# Altium PCB Digital_Input_PCB.PcbDoc (part 2 of 3)
Units mil, origin at the board's own origin, x right, y up, seen from the top; angles counter-clockwise.
Board outline 5600 x 4000 mil, 4 copper layers (Top Layer, Plane(Gnd), Plane(Power), Bottom Layer), stack 23.756 mil thick; 260 components, 287 nets, 712 pads, 291 vias.
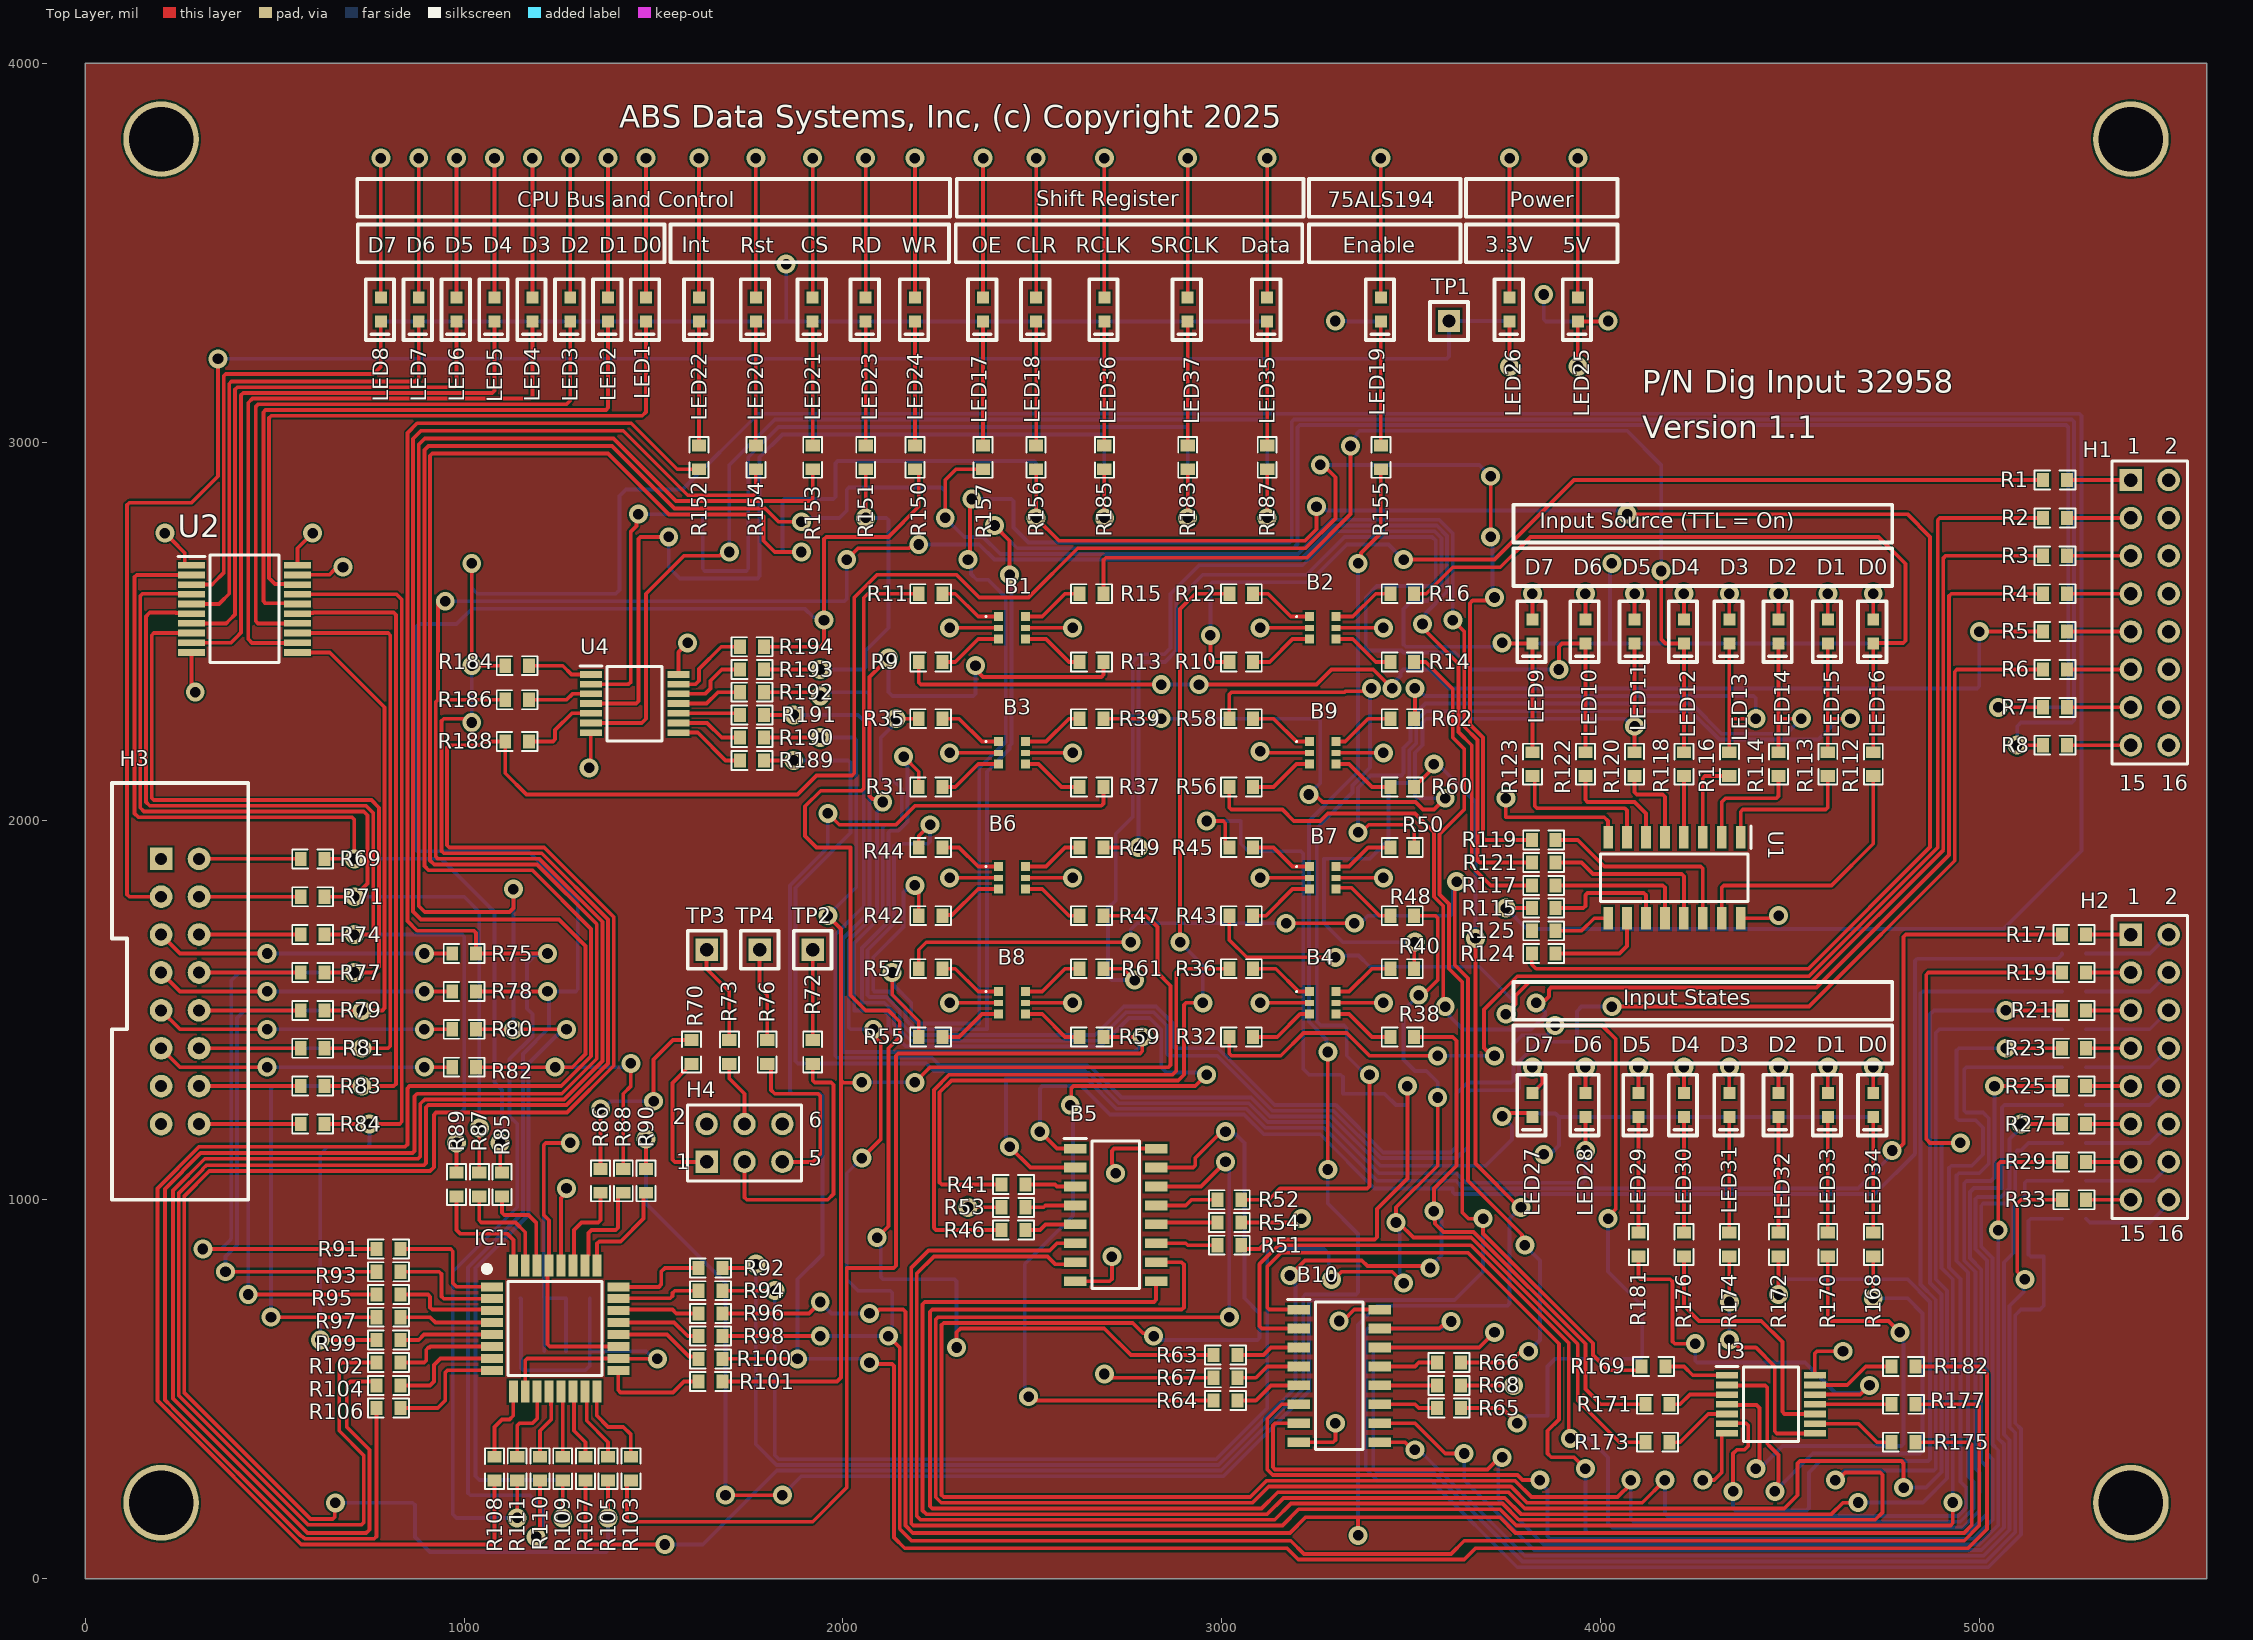
[diagram p0: Top Layer view]

## Via types
v1: diameter 50, hole 28, Top Layer to Bottom Layer, 291 vias

## Nets (pads, with @x,y where several pads share a name; then routed paths per layer and width w, separated by ;. In a path a pad name is that pad's centre, name@x,y a point inside that pad or via, vN(x,y) a via of type N, cw(c..) or ccw(c..) an arc to the next point about the centre after c; other vN are vias at no path point) (continued)
Digital_Input_1: (continued)
  Top Layer w10: R92.2@1681.5,820 1750,820 1760,830 v1(1770,830) ; v1(3180,800) 3220,840 3369.59,840 3384.59,825 3545,825 v1(3550.25,819.75) ; R38.1@3507.99,1430 3610,1430 3620,1420 3620,1090 3560,1030 v1(3560,970) 3563.28,966.72 3563.28,936.72 3585,915 3665,915 3960,620 3960,500 4000,460 R171.2@4118.5,460
  Bottom Layer w10: v1(1770,830) 1770,354.64 1824.64,300 2991.21,300 3195,503.79 3195,785 v1(3180,800) ; v1(3550.25,819.75) 3550.25,823.89 3580,853.64 3580,944.14 3560,964.14 v1(3560,970)
Digital_Input_2: R48.1 R94.2 R173.2 | length 4964.9
  Top Layer w10: R94.2@1681.5,760 v1(1820,760) ; v1(3290,790) 3295.86,790 3315.86,810 3450,810 v1(3480,780) ; R48.1@3507.99,1750 3564.14,1750 3570,1744.14 3570,1580 3530,1540 v1(3520,1540) ; v1(3570,1270) 3570,1090 3460,980 v1(3460,940) 3465.86,940 3505.86,900 3658.79,900 3940,618.79 3940,470 4050,360 R173.2@4118.5,360
  Bottom Layer w10: v1(1820,760) 1820,325.86 1830.86,315 2985,315 3120,450 3120,864.14 3125.86,870 3270,870 3282.35,857.65 3282.35,797.65 v1(3290,790) ; v1(3460,940) 3467.65,932.35 3467.65,916.49 3470,914.14 3470,805.86 3472.35,803.51 3472.35,787.65 v1(3480,780) ; v1(3520,1540) 3480,1500 3480,1370 3510,1340 3540,1340 3570,1310 v1(3570,1270)
Digital_Input_3: R60.1 R96.2 R175.2 | length 6952.6
  Top Layer w10: R96.2@1681.5,700 1910,700 v1(1940,730) ; v1@2065.86,700 2073.51,707.65 2093.51,707.65 2095.86,710 2159.14,710 2165,704.14 2165,139.64 2184.04,120.61 3180,120.61 3221.39,162 3360,162 ; v1(3360,114) 3360,162 ; R60.1@3507.99,2090 3507.99,2092.95 3518.74,2103.7 3521.69,2103.7 3560,2142.01 v1(3560,2150) ; v1(3670,1690) 3670,1095.34 v1@3787.67,977.67 ; R175.2@4831.5,360 4974.14,360 4980,354.14 4980,141.21 4959.39,120.61 3775.75,120.61 3734.36,162 3360,162
  Bottom Layer w10: v1(1940,730) 1970,700 v1@2060,700 ; v1(3360,114) 3360,670 3410,720 3754.14,720 3760,725.86 3760,950 v1(3790,980) ; v1(3560,2150) 3570,2150 3670,2050 v1(3670,1690)
  other v1: 2070,700
Digital_Input_4: R13.1 R98.2 R177.2 | length 7220.8
  Top Layer w10: R98.2@1681.5,640 v1(1940,640) ; v1(2050,1110) 2100,1160 2100,1414.14 2087.65,1426.49 2087.65,1442.35 v1(2080,1450) ; v1(2105,2050) 2097.35,2057.65 2078.2,2057.65 2070,2065.86 2070,2380 v1(2120,2430) ; v1(2120,640) 2150,610 2150,131.21 2181.21,100 3182,100 3217,65 3605,65 3640,100 4960,100 5000,140 5000,454.14 4994.14,460 R177.2@4831.5,460 ; v1(2350,2410) 2350,2400 2370,2380 2682.13,2380 2687.99,2385.86 R13.1@2687.99,2420
  Bottom Layer w10: v1(1940,640) v1@2110,640 ; v1(2050,1110) 2010,1070 2010,790 2040,760 2124.14,760 2130,754.14 2130,665.86 2127.65,663.51 2127.65,647.65 v1(2120,640) ; v1(2080,1450) 2020.86,1450 2015,1455.86 2015,1683.79 2090,1758.79 2090,2024.18 2105,2039.18 v1(2105,2050) ; v1(2120,2430) 2120,2340 2130,2330 2344.14,2330 2350,2335.86 v1(2350,2410)
Digital_Input_5: R37.1 R100.2 R182.2 | length 6858.2
  Top Layer w10: R100.2@1681.5,580 v1(1880,580) ; v1(1960,2020) 1990,1990 2140,1990 2190,2040 2682.13,2040 2687.99,2045.86 R37.1@2687.99,2090 ; v1(2070,570) 2073.28,566.72 2129.14,566.72 2135,560.86 2135,108.16 2163.16,80 3172,80 3202,50 3640,50 3670,80 4970,80 5020,130 5020,540 5000,560 R182.2@4831.5,560
  Bottom Layer w10: v1(1960,2020) 1960,1930 1860,1830 1860,1285.86 1865.86,1280 1939.75,1280 1945.61,1274.14 1945.61,855.61 1880,790 v1(1880,580) 2049.18,580 2059.18,570 v1(2070,570)
Digital_Input_6: R47.1 R101.2 R190.2 | length 3717.6
  Top Layer w10: R101.2@1681.5,520 1984.14,520 1995,530.86 1995,1315 ; R190.2@1791.5,2220 v1(1940,2220) ; v1(1960,1750) 1995,1715 1995,1315 ; v1(2050,1310) 2049.14,1309.14 2000.86,1309.14 1995,1315 ; v1(2190,1310) 2230,1350 2859.14,1350 2865,1355.86 2865,1565 2830,1600 2830,1720 2800,1750 R47.1@2687.99,1750
  Bottom Layer w10: v1(1940,2220) 2029.14,2220 2035,2214.14 2035,1825 v1(1960,1750) ; v1(2050,1310) v1(2190,1310)
Digital_Input_6_Inv: LED28.1 R189.1 | length 3467.3
  Top Layer w10: R189.1@1791.5,2160 v1(1870,2160) ; v1(3960,1130) LED28.1@3960,1218.5
  Bottom Layer w10: v1(1870,2160) 2014.14,2160 2020,2154.14 2020,1968.79 1875,1823.79 1875,1365.86 1880.86,1360 2220,1360 2240,1340 2638.79,1340 2643.79,1335 2648.79,1335 2728.79,1255 3071.36,1255 3121.36,1205 3280,1205 3415,1070 3620,1070 3645,1045 3954.14,1045 3960,1050.86 v1(3960,1130)
Digital_Input_7: R59.1 R103.2 R192.2 | length 4868.8
  Top Layer w10: R103.2@1440,258.5 1430,248.5 1430,155.86 1435.86,150 1920,150 2010,240 2010,820 2134.14,820 2140,825.86 2140,1380.35 2145.86,1386.21 2784.14,1386.21 2790,1392.07 v1(2790,1430) R59.1@2687.99,1430 ; R192.2@1791.5,2340 1930,2340 v1(1940,2330)
  Bottom Layer w10: v1(1940,2330) 1947.65,2337.65 1963.51,2337.65 1965.86,2340 2064.14,2340 2070,2334.14 2070,1760 2000,1690 2000,1390 2770,1390 2782.35,1402.35 2782.35,1422.35 v1(2790,1430)
Digital_Input_7_Inv: LED27.1 R191.1 | length 3280.4
  Top Layer w10: R191.1@1791.5,2280 v1(1870,2280) ; v1(3740,1220) 3750.82,1220 3760.16,1229.34 3803.39,1229.34 3803.48,1229.25 3809.25,1229.25 LED27.1@3820,1218.5
  Bottom Layer w10: v1(1870,2280) 2040,2280 2055,2265 2055,1775 1980,1700 1980,1380 1985,1375 2235,1375 2255,1355 2645,1355 2650,1350 2655,1350 2735,1270 3077.57,1270 3127.57,1220 3288.79,1220 3418.79,1090 3696.66,1090 3766,1159.34 3766,1194 v1(3740,1220)
Digital_Input_Source_0: LED16.1 R16.2 R112.2 | length 1966.8
  Top Layer w10: R16.2@3507.99,2600 3540,2600 3610,2670 3735,2670 3815,2750 4734.14,2750 4805,2679.14 4805,2475.86 4799.14,2470 4721.5,2470 LED16.1@4720,2468.5 R112.2@4720,2181.5
Digital_Input_Source_1: LED15.1 R40.2 R113.2 | length 2623.5
  Top Layer w10: R40.2@3507.99,1610 3507.99,1677.99 v1(3510,1680) ; R113.2@4600,2181.5 LED15.1@4600,2468.5 ; 4600,2270 v1(4660,2270)
  Bottom Layer w10: v1(3510,1680) 3320,1680 3270,1730 3270,1900 3390,1900 3440,1950 3440,2094.14 3445.86,2100 3495,2100 3495,2186.21 3513.55,2204.76 3513.55,2264.76 3538.18,2289.39 4239.39,2289.39 4313.79,2215 4575,2215 4626.72,2266.72 4656.72,2266.72 v1(4660,2270)
Digital_Input_Source_2: LED14.1 R50.2 R114.2 | length 2061.4
  Top Layer w10: v1(3360,1970) 3368.2,1970 3388.2,1990 3498.79,1990 3507.99,1980.79 R50.2@3507.99,1930 ; R114.2@4470,2181.5 LED14.1@4470,2468.5 ; 4470,2270 v1(4530,2270)
  Bottom Layer w10: v1(3360,1970) 3360,2087.57 3392.43,2120 3474.14,2120 3480,2125.86 3480,2192.43 3498.55,2210.98 3498.55,2270.98 3537.57,2310 4240,2310 4320,2230 4490,2230 v1(4530,2270)

## Text inside footprints (layer, text, board x,y; h text height)
H1: Top Overlay "2" at 5490,2970 h40; Top Overlay "1" at 5390,2970 h40; Top Overlay "15" at 5370,2080 h40; Top Overlay "16" at 5480,2080 h40
H2: Top Overlay "2" at 5490,1780 h40; Top Overlay "1" at 5390,1780 h40; Top Overlay "15" at 5370,890 h40; Top Overlay "16" at 5470,890 h40
H4: Top Overlay "1" at 1560,1080 h40; Top Overlay "2" at 1550,1200 h40; Top Overlay "5" at 1910,1090 h40; Top Overlay "6" at 1910,1190 h40